# Altium PCB PCB_3U_Tester.PCBDOC
Units mil, origin at the board's own origin, x right, y up, seen from the top; angles counter-clockwise.
Board outline 2496.06 x 3937 mil, 4 copper layers (TopLayer, Internal Plane 2, Internal Plane 1, BottomLayer), stack 35.634 mil thick; 69 components, 58 nets, 346 pads, 138 vias.
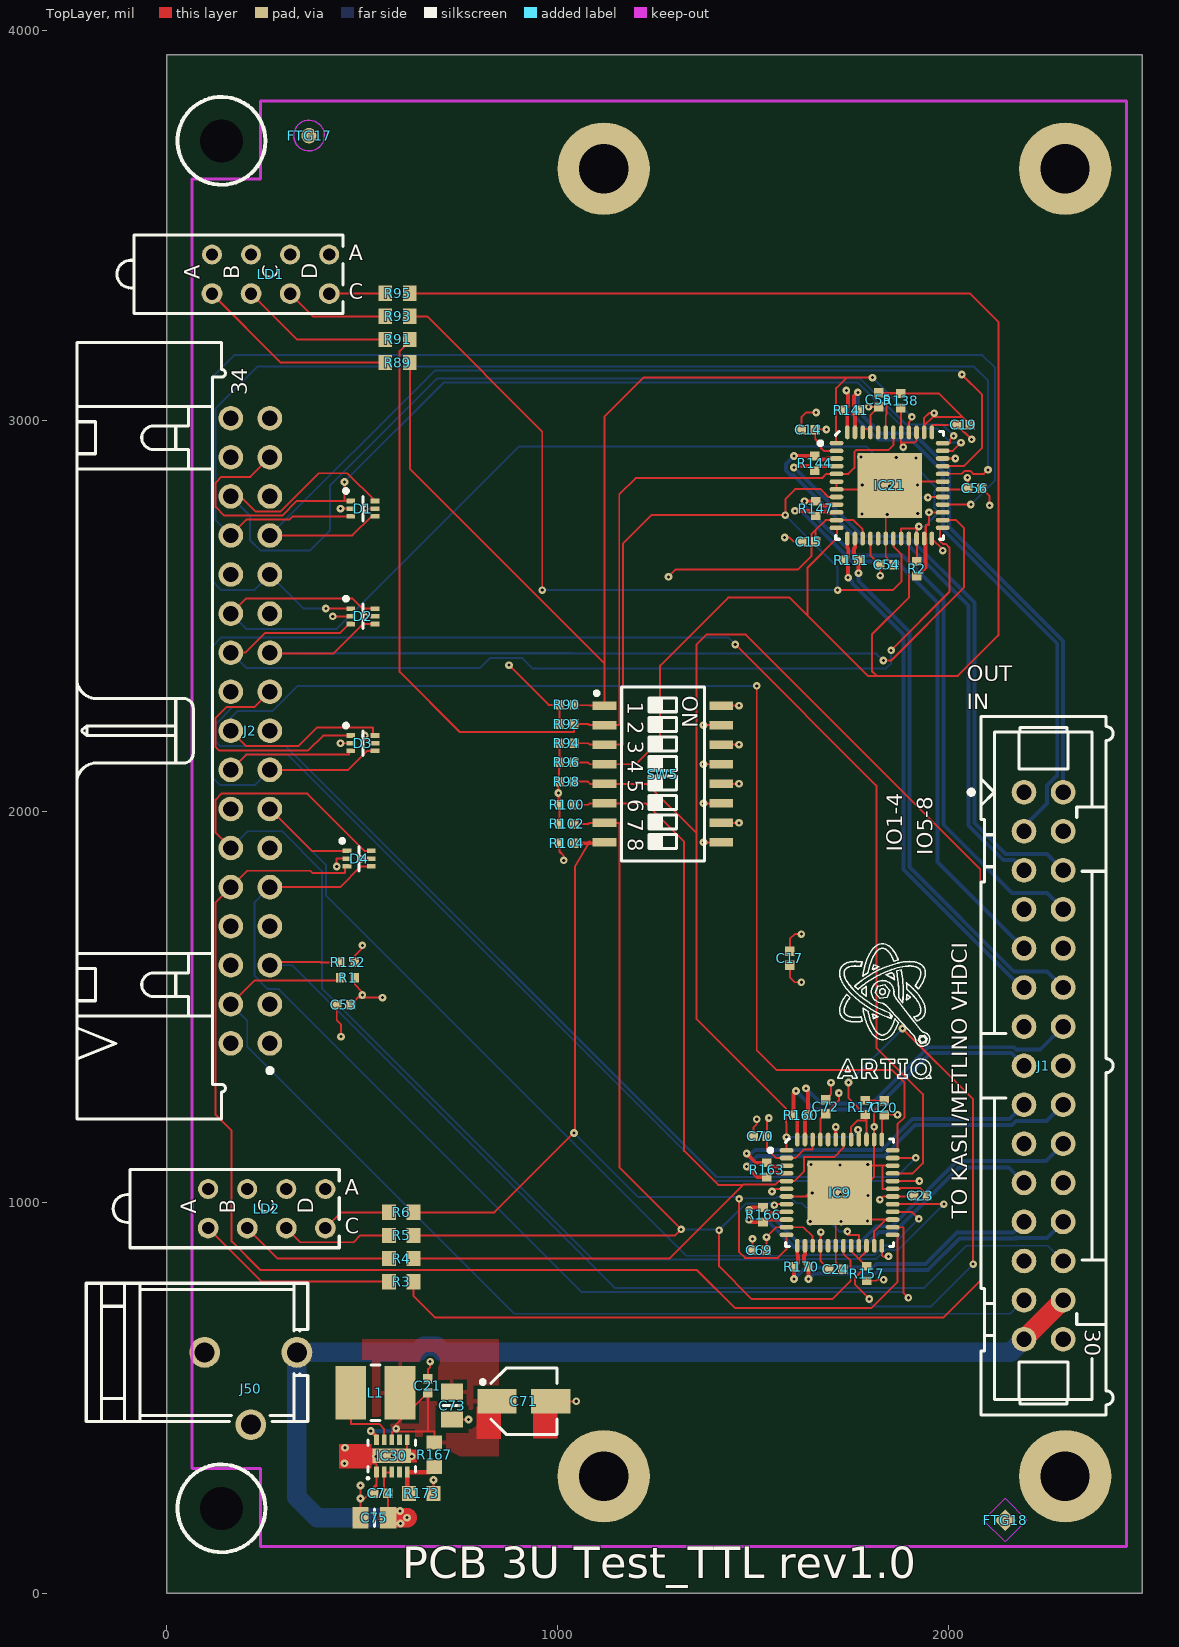
[diagram p0: TopLayer view]
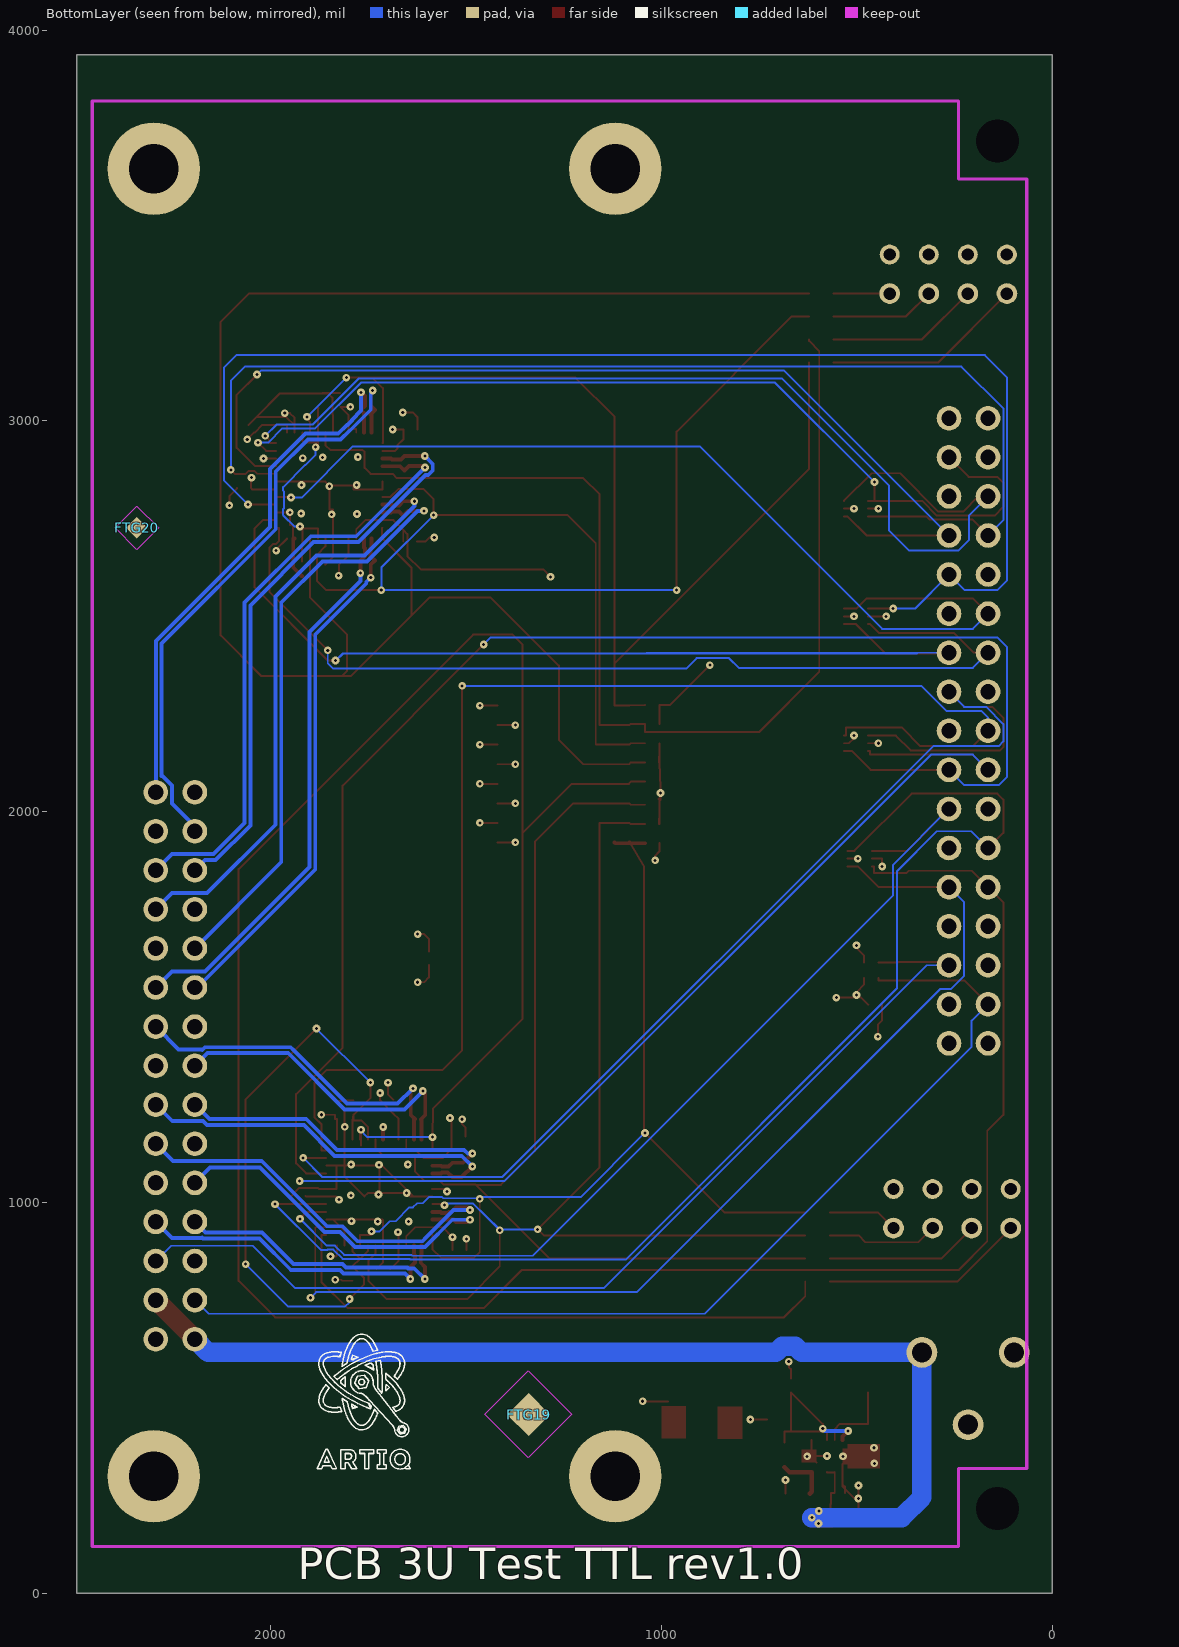
[diagram p1: BottomLayer view, seen from below]
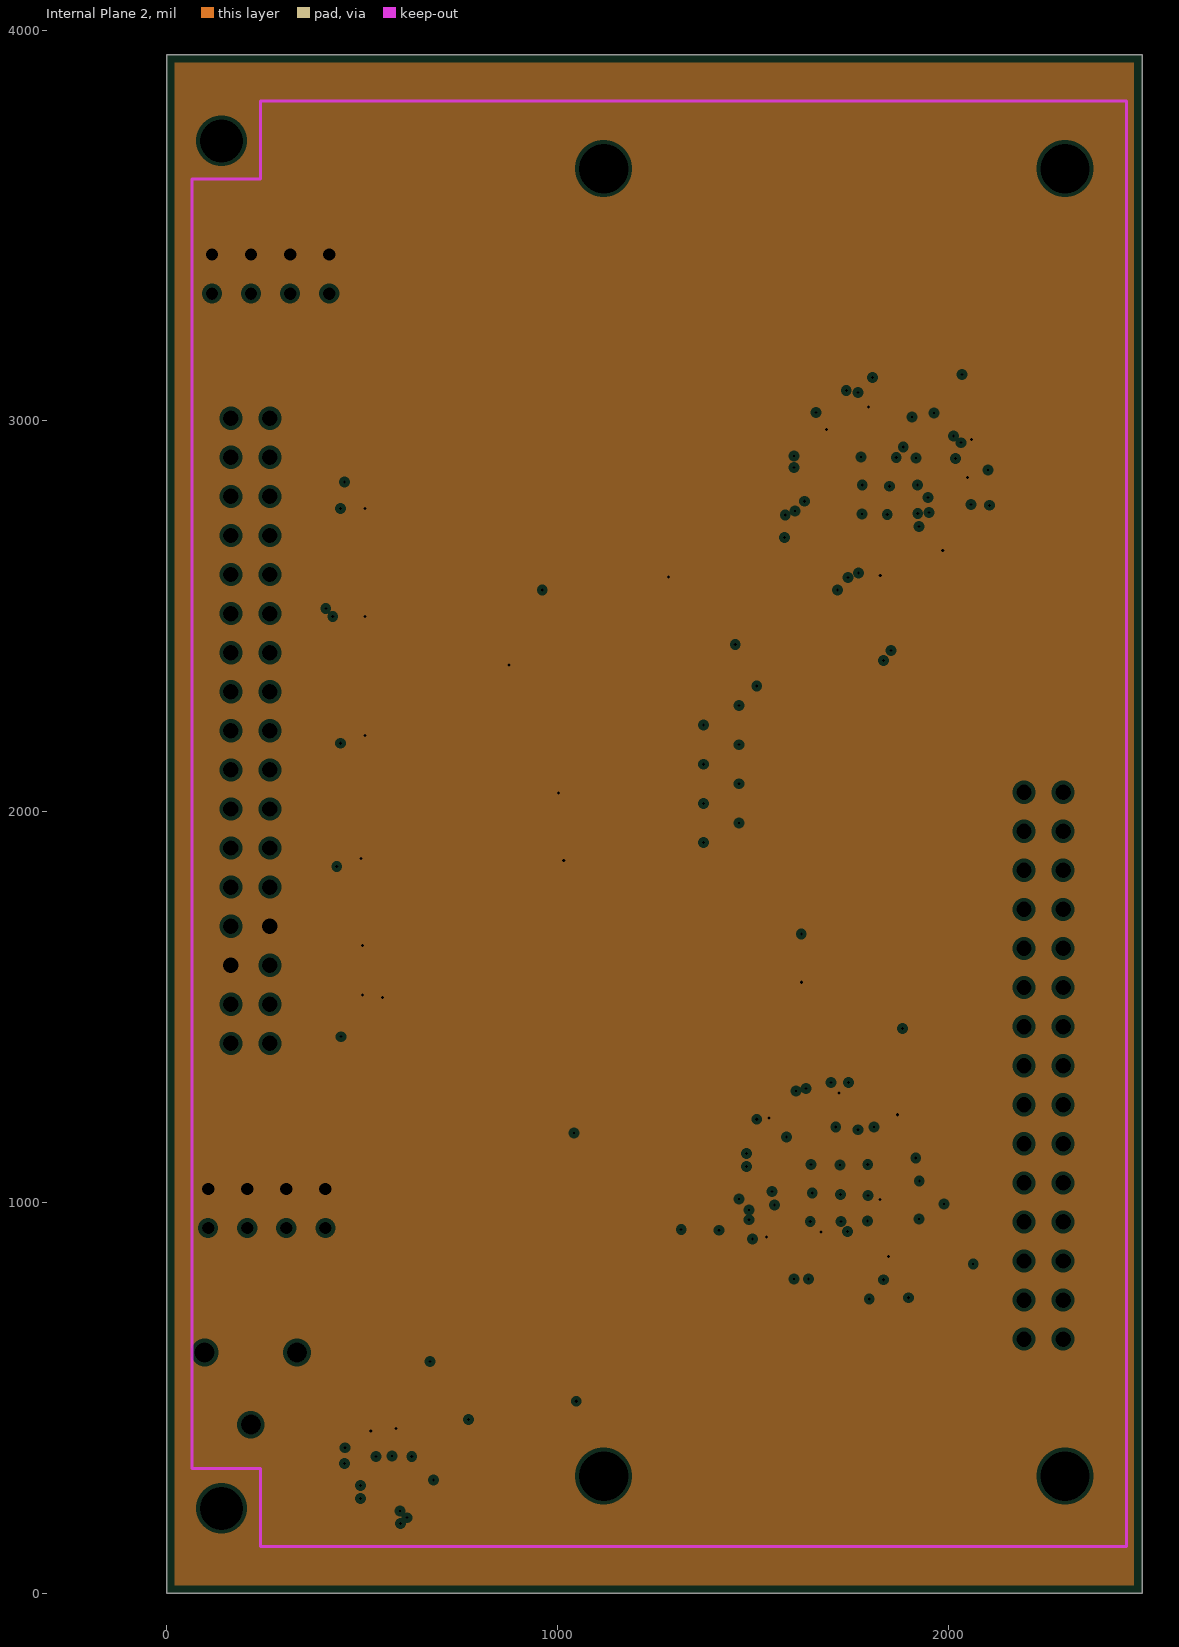
[diagram p2: Internal Plane 2, clearances drawn from the general rule]
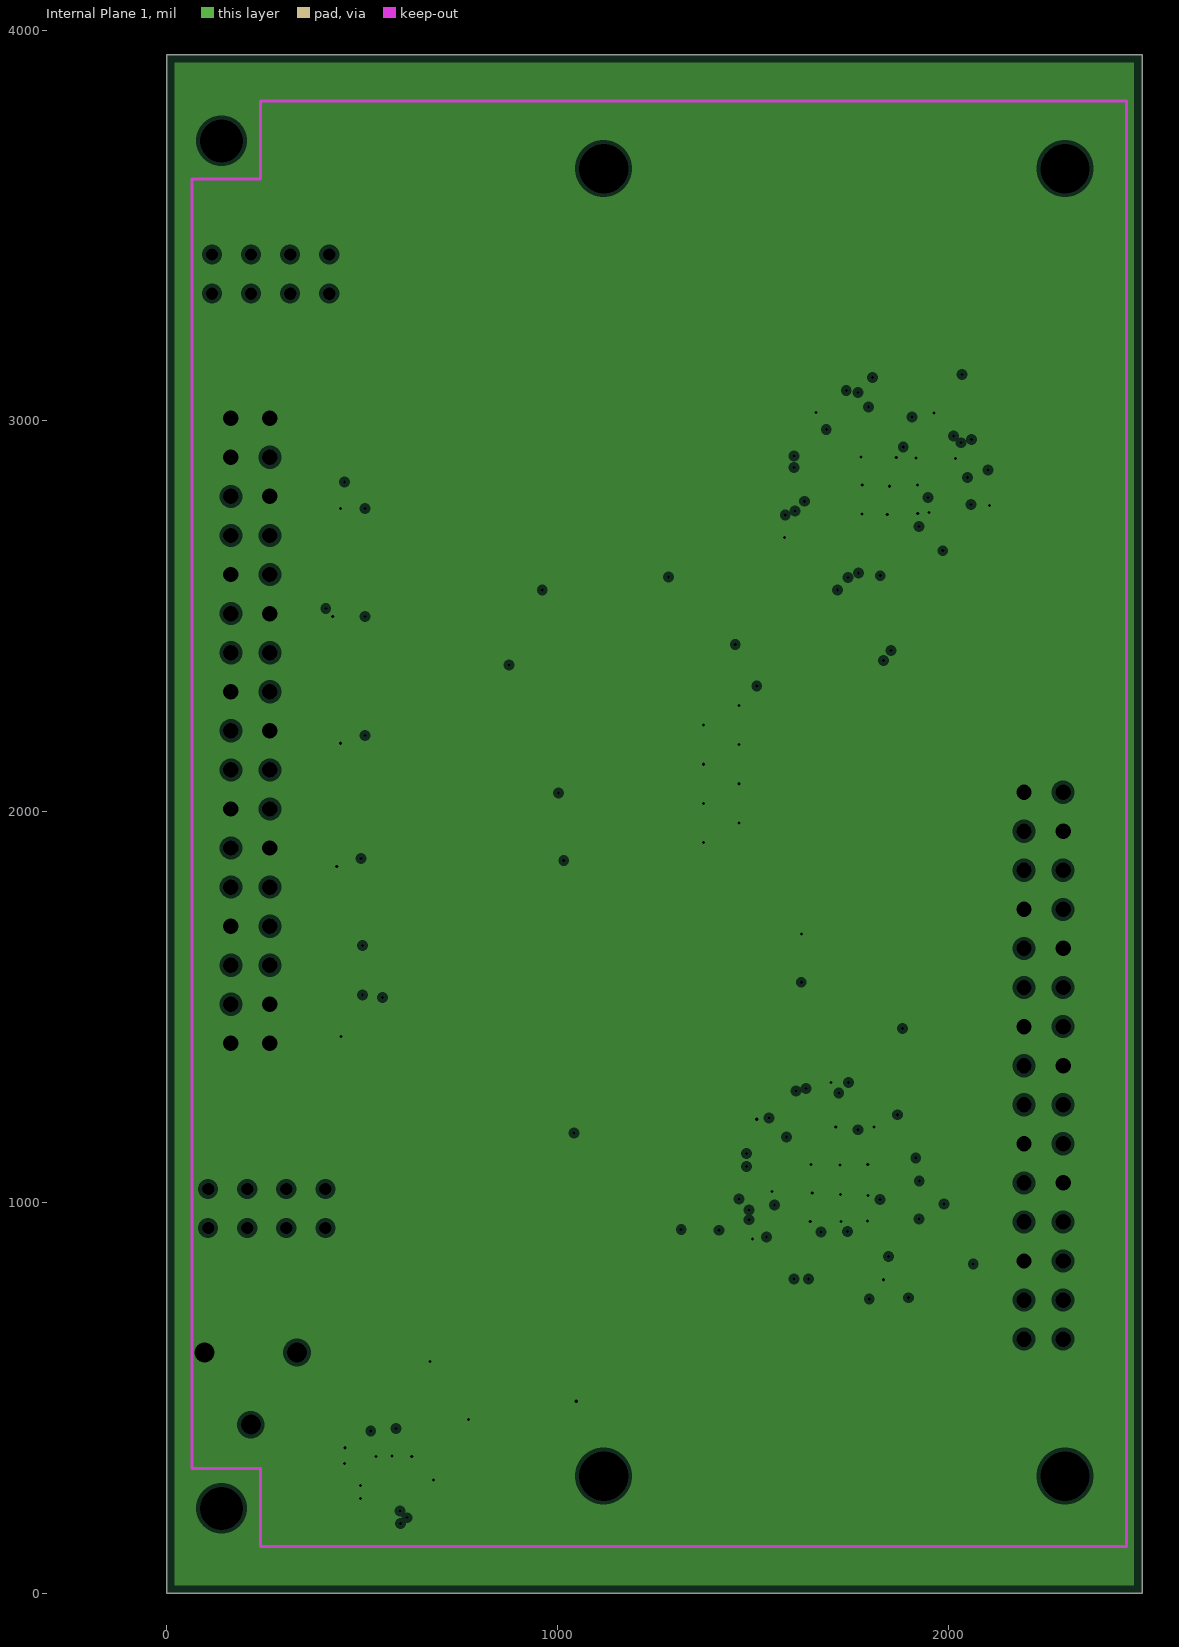
[diagram p3: Internal Plane 1, clearances drawn from the general rule]
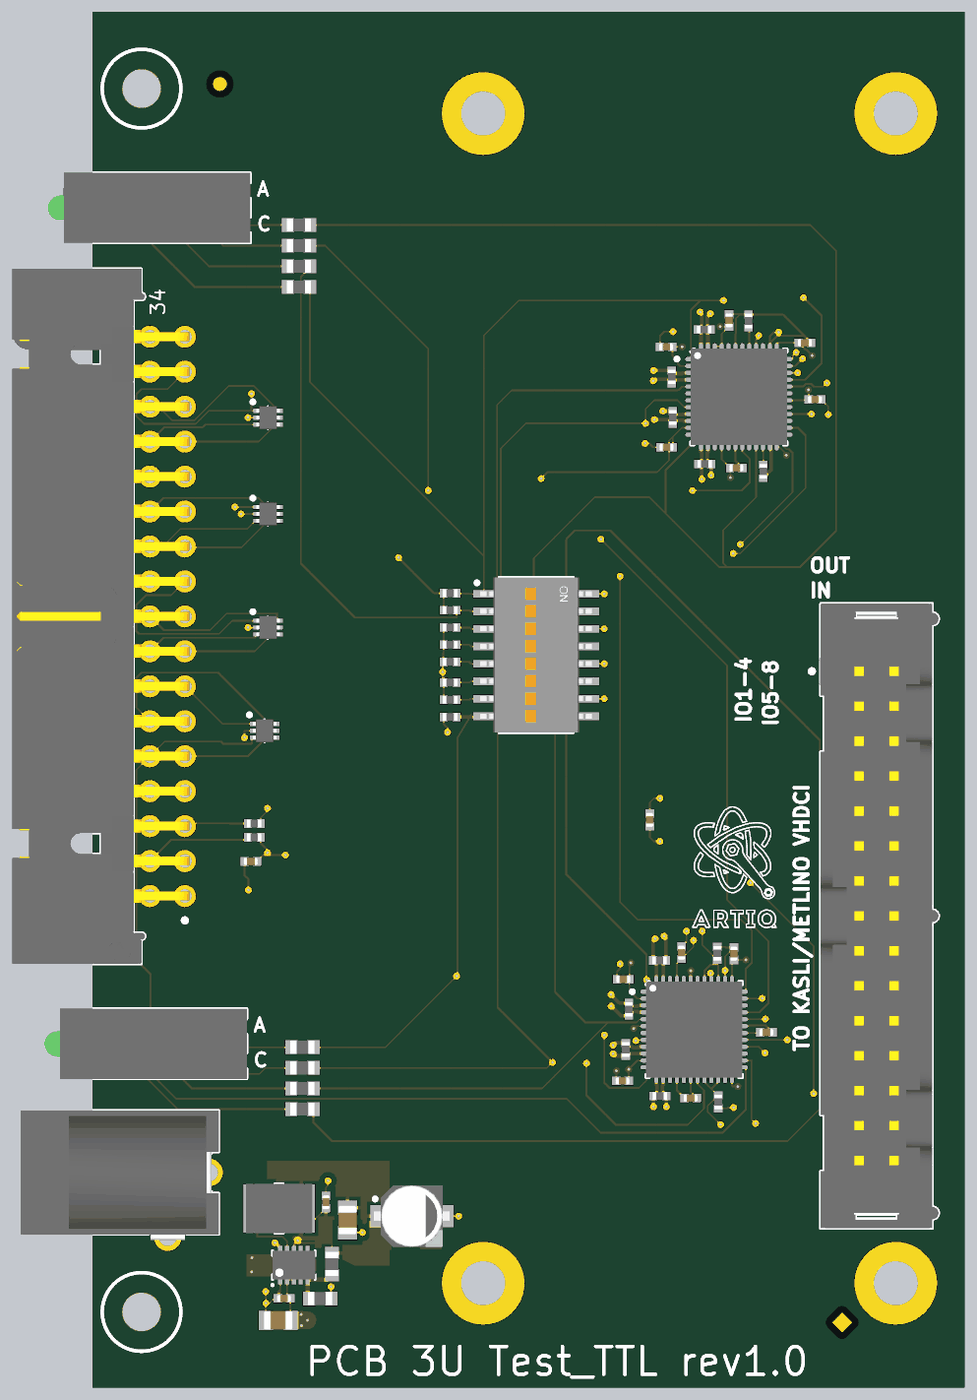
[diagram p4: 3D render of the assembled board from above, using the file's embedded part models]

## Layer stack, top to bottom
TopSolder: solder mask 0.4, Solder Resist, Dk 3.5
TopLayer: signal copper 1.4
Dielectric1: core 15, FR-4, Dk 4.8
Internal Plane 2: plane copper 1.417, net P3V3
Dielectric 3: prepreg 5, Dk 4.2
Internal Plane 1: plane copper 1.417, net GND
Dielectric2: core 10, FR-4, Dk 4.2
BottomLayer: signal copper 1.4
BottomSolder: solder mask 0.4, Solder Resist, Dk 3.5

## Board outline
0,0 2496.06,0 2496.06,3937 0,3937

## Design rules (kind name [scope] priority, off if disabled: settings)
Clearance Clearance_DIFF [(InDifferentialPairClass('All Differential Pairs'))] p1: gap=5 except(10: Arc-Poly Track-Poly SMDPad-Poly THPad-Poly Via-Poly Fill-Poly Poly-Poly Poly-Region Poly-Text)
Clearance [All] p2: gap=5 except(15: Arc-Poly Track-Poly SMDPad-Poly THPad-Poly Via-Poly Fill-Poly Poly-Poly)
DiffPairsRouting [All] p1: maxlimit=10 minlimit=5 mostfreqgap=5 toplayer_minwidth=5 toplayer_maxwidth=15 toplayer_prefwidth=10 bottomlayer_minwidth=5 bottomlayer_maxwidth=15 bottomlayer_prefwidth=10 maxuncoupledlength=500
FabricationTestPointUsage TestPointUsage [All] p1: valid=0 allowmultiple=FALSE
FabricationTestpoint Testpoint [All] p1: side=3 testpointundercomponent=TRUE minsize=40 maxsize=100 preferedsize=60 minholesize=20 maxholesize=40 preferedholesize=32 testpointgrid=1 allowsidetop=TRUE allowsidebottom=TRUE usegrid=TRUE gridtolerance=0.01
HoleSize [All] p1: absolutevalues=TRUE maxlimit=150 minlimit=1 maxpercent=80.000 minpercent=20.000
HoleToHoleClearance [All] p1: gap=1 allowstackedmicrovias=TRUE
MinimumSolderMaskSliver [All] p1: minsoldermaskwidth=0
PlaneClearance [All] p1: clearance=10
PlaneConnect [All] p1: planeconnectstyle=Direct reliefexpansion=20 reliefentries=4 reliefconductorwidth=10 reliefairgap=10
PolygonConnect PolygonConnect_pad [(InPadClass('All Pads'))] p1: connectstyle=Relief reliefconductorwidth=10 reliefentries=4 polygonreliefangle="90 Angle" airgapwidth=10
PolygonConnect [All] p2: connectstyle=Direct reliefconductorwidth=10 reliefentries=4 polygonreliefangle="45 Angle" airgapwidth=10
RoomDefinition PCB_3U_Tester [InComponentClass('PCB_3U_Tester')] p1: confinementstyle=ConfineIn formatcopy=TRUE lockcomponents=FALSE outline -960,-90 2512,-90 2512,4002 -960,4002
RoutingVias [All] p1: holewidth=7.87 width=19.68 viastyle="Through Hole" minholewidth=7.87 minwidth=19.68 maxholewidth=28 maxwidth=50
SilkToSilkClearance [All] p1: silktosilkclearance=0
SilkToSolderMaskClearance SilkscreenOverComponentPads [IsPad] p1: minsilkscreentomaskgap=0 clearancetoexposedcopper=TRUE
SolderMaskExpansion [All] p1: expansion=2
Width [All] p1: maxlimit=50 minlimit=5 preferedwidth=5
20 further rules are at their usual default settings.

## Classes and differential pairs
differential pair LVDS8: +LVDS8_P -LVDS8_N
differential pair LVDS7: +LVDS7_P -LVDS7_N
differential pair LVDS6: +LVDS6_P -LVDS6_N
differential pair LVDS5: +LVDS5_P -LVDS5_N
differential pair LVDS4: +LVDS4_P -LVDS4_N
differential pair LVDS3: +LVDS3_P -LVDS3_N
differential pair LVDS2: +LVDS2_P -LVDS2_N
differential pair LVDS1: +LVDS1_P -LVDS1_N

## Components (designator, comment, footprint, x,y, rotation, side; value= is the part's Value field where it differs from the comment)
C14 "100nF" CAPC1005X55N 1642,2978 r0 top
C15 "100nF" CAPC1005X55N 1643,2691 r0 top
C17 "100nF" CAPC1005X55N 1595,1625 r270 top
C19 "100nF" CAPC1005X55N 2039,2990 r180 top
C20 "100nF" CAPC1005X55N 1836,1242 r270 top
C21 "100nF" CAPC1005X55N 668,531 r270 top
C23 "100nF" CAPC1005X55N 1929,1017 r180 top
C24 "100nF" CAPC1005X55N 1712,829 r180 top
C53 "100nF" CAPC1005X55N 452.76,1505.91 r0 top
C54 "100nF" CAPC1005X55N 1843,2632 r180 top
C55 "100nF" CAPC1005X55N 1822,3054 r270 top
C56 "100nF" CAPC1005X55N 2068,2828 r180 top
C69 "100nF" CAPC1005X55N 1517,878 r0 top
C70 "100nF" CAPC1005X55N 1519,1169 r0 top
C71 "10uF" CAPAE430X540N 914,491 r0 top
C72 "100nF" CAPC1005X55N 1686,1245 r270 top
C73 "22uF" CAPC2012X135N 730,480 r90 top
C74 "100nF" CAPC1005X55N 548,256 r0 top
C75 "22uF" CAPC2012X135N 531.24,193 r0 top
D1 "NUP4114UPXV6T1G" SOTFL50P160X60-6N 501.97,2775.59 r0 top
D2 "NUP4114UPXV6T1G" SOTFL50P160X60-6N 501.97,2500 r0 top
D3 "NUP4114UPXV6T1G" SOTFL50P160X60-6N 501.97,2175.2 r0 top
D4 "NUP4114UPXV6T1G" SOTFL50P160X60-6N 492.13,1879.92 r0 top
FTG17 "Use only in PCB" FIDUCIAL_TOP_C100-200 364.17,3730.32 r90 top
FTG18 "Use only in PCB" FIDUCIAL_TOP_S100-200 2145.67,187.01 r90 top
FTG19 "Use only in PCB" FIDUCIAL_TOP_S200-400 1340,457 r180 bottom
FTG20 "Use only in PCB" FIDUCIAL_TOP_S100-200 2342.52,2726.38 r90 bottom
IC9 "SN65MLVD040RGZT" QFN50P700X700X100-49N-S420 1722,1025 r0 top
IC21 "SN65MLVD040RGZT" QFN50P700X700X100-49N-S420 1850,2835 r0 top
IC30 "TPS62175DQC" SON50P200X300X80-11N-R94X250 576,351 r90 top
J1 "Familly" 3M_N2530-6002RB 2244,1350 r270 top locked
J2 "Header 34" 3M_N2534-5002RB 214,2207 r90 top
J50 "Jack" CUI_PJ-102BH 97,616 r270 top
L1 "10uH" IND_MURATA-PS_8400 534.01,513 r0 top
LD1 "Green" LED_BIVAR_H485CGDL 265.75,3375.98 r0 top
LD2 "Green" LED_BIVAR_H485CGDL 255.91,984.25 r0 top
R1 "10k" RESC1005X40N 462.6,1574.8 r180 top
R2 "10k" RESC1005X40N 1920,2622 r270 top
R3 "220" RESC1608X55N 600.39,797.24 r0 top
R4 "220" RESC1608X55N 600.39,856.3 r0 top
R5 "220" RESC1608X55N 600.39,915.35 r0 top
R6 "220" RESC1608X55N 600.39,974.41 r0 top
R89 "220" RESC1608X55N 590.55,3149.61 r0 top
R90 "10k" RESC1005X40N 1023.62,2273.62 r180 top
R91 "220" RESC1608X55N 590.55,3208.66 r0 top
R92 "10k" RESC1005X40N 1023.62,2224.41 r180 top
R93 "220" RESC1608X55N 590.55,3267.72 r0 top
R94 "10k" RESC1005X40N 1023.62,2175.2 r180 top
R95 "220" RESC1608X55N 590.55,3326.77 r0 top
R96 "10k" RESC1005X40N 1023.62,2125.98 r180 top
R98 "10k" RESC1005X40N 1023.62,2076.77 r180 top
R100 "10k" RESC1005X40N 1023.62,2017.72 r180 top
R102 "10k" RESC1005X40N 1023.62,1968.5 r180 top
R104 "10k" RESC1005X40N 1023.62,1919.29 r180 top
R138 "100" RESC1005X40N 1878,3052 r90 top
R141 "100" RESC1005X40N 1751,3028 r180 top
R144 "100" RESC1005X40N 1658,2892 r270 top
R147 "100" RESC1005X40N 1661,2776 r270 top
R151 "100" RESC1005X40N 1752,2643 r0 top
R152 "10k" RESC1005X40N 462.6,1614.17 r180 top
R157 "100" RESC1005X40N 1791,818 r270 top
R160 "100" RESC1005X40N 1623,1223 r180 top
R163 "100" RESC1005X40N 1535,1083 r270 top
R166 "100" RESC1005X40N 1526,968 r270 top
R167 "270k" RESC1608X55N 685,354 r90 top
R170 "100" RESC1005X40N 1624,835 r0 top
R171 "10k" RESC1005X40N 1788,1243 r90 top
R173 "82k" RESC1608X55N 651,255 r180 top
SW5 "Switch" SW_TYCO_1-1571983-0 1269.69,2096.46 r0 top

## Footprints (in the part's own frame and the unit in brackets; to place one, negate y for a bottom-side part, rotate by r counter-clockwise, add the part's x,y. Pads: shape width x height; smd on the part's side, far side on the other; paste and mask are expansions set on the pad)
3M_N2530-6002RB [mm] "30 Contacts - Straight .100\" x .100\" Low Profile Four-Wall Header"
  round 1.6 hole 1: 1(-17.78,-1.27) 2(-17.78,1.27) 3(-15.24,-1.27) 4(-15.24,1.27) 5(-12.7,-1.27) 6(-12.7,1.27) 7(-10.16,-1.27) 8(-10.16,1.27) 9(-7.62,-1.27) 10(-7.62,1.27) 11(-5.08,-1.27) 12(-5.08,1.27) 13(-2.54,-1.27) 14(-2.54,1.27) 15(0,-1.27) 16(0,1.27) 17(2.54,-1.27) 18(2.54,1.27) 19(5.08,-1.27) 20(5.08,1.27) 21(7.62,-1.27) 22(7.62,1.27) 23(10.16,-1.27) 24(10.16,1.27) 25(12.7,-1.27) 26(12.7,1.27) 27(15.24,-1.27) 28(15.24,1.27) 29(17.78,-1.27) 30(17.78,1.27)
  silkscreen extent -22.71,-4.85 22.71,4.52, body extent -22.71,-4.11 22.71,4.52, height 9.91
3M_N2534-5002RB [mm] "34 Contacts - Right Angle .100\" x .100\" Low Profile Four-Wall Header"
  round 1.6 hole 1: 1(-20.32,-1.27) 2(-20.32,1.27) 3(-17.78,-1.27) 4(-17.78,1.27) 5(-15.24,-1.27) 6(-15.24,1.27) 7(-12.7,-1.27) 8(-12.7,1.27) 9(-10.16,-1.27) 10(-10.16,1.27) 11(-7.62,-1.27) 12(-7.62,1.27) 13(-5.08,-1.27) 14(-5.08,1.27) 15(-2.54,-1.27) 16(-2.54,1.27) 17(0,-1.27) 18(0,1.27) 19(2.54,-1.27) 20(2.54,1.27) 21(5.08,-1.27) 22(5.08,1.27) 23(7.62,-1.27) 24(7.62,1.27) 25(10.16,-1.27) 26(10.16,1.27) 27(12.7,-1.27) 28(12.7,1.27) 29(15.24,-1.27) 30(15.24,1.27) 31(17.78,-1.27) 32(17.78,1.27) 33(20.32,-1.27) 34(20.32,1.27)
  silkscreen extent -25.24,-1.42 25.25,11.28, body extent -25.24,-1.59 25.25,11.27, height 8.64
CAPAE430X540N [mm] "Capacitor, Aluminium Electrolytric, 4.3mm L X 4.3mm W X 5.4mm H, IPC Medium Density"
  rect 2.55x1.6 smd: 1(-1.75,0) 2(1.75,0)
  silkscreen extent -2.8,-2.15 2.15,2.15, body extent -2.75,-2.25 2.75,2.25, height 5.7
CAPC1005X55N [mm] "Chip Capacitor, Body 1.0x0.55mm, IPC Medium Density"
  rect 0.62x0.62 smd: 1(-0.45,0) 2(0.45,0)
  body extent -0.52,-0.27 0.53,0.28, height 0.55
CAPC2012X135N [mm] "Chip Capacitor, Body 2.0x1.25mm, IPC Medium Density"
  rect 1.05x1.4 smd: 1(-0.9,0) 2(0.9,0)
  silkscreen extent 0,-0.58 0,0.58, body extent -1.05,-0.67 1.05,0.68, height 1.25
CUI_PJ-102BH [mm] "2.5 mm Center Pin, 5A, 24V Right Angle, Through Hole, Tapered Pins, DC Power Jack Connector"
  round 2 hole 1.3: 1(0,6) 2(0,0) 3(4.7,3)
  silkscreen extent -4.5,-7.7 4.5,6.7, body extent -4.5,-7.7 4.9,6.7, height 11
FIDUCIAL_TOP_C100-200 [mm] "Round Fiducial Target, Top Layer, 1.0mm, Top Solder 2.0mm, Keepout =2.0mm"
  round 1 smd paste-0.51 mask+0.5: FTG2(0,0)
  TopLayer keep-out circle w0.1: c0,0 r1
FIDUCIAL_TOP_S100-200 [mm] "Square Fiducial Target, Top Layer, 1.0mm, Top Solder 2.0mm, Keepout =2.0mm"
  rect 1x1 smd rot 45 paste-0.51 mask+0.5: 1(0,0)
  TopLayer keep-out region: 1.414,0 0,-1.414 -1.414,0 0,1.414
FIDUCIAL_TOP_S200-400 [mm] "Square Fiducial Target, Top Layer, 2.0mm, Top Solder 4.0mm, Keepout =4.0mm"
  rect 2x2 smd rot 45 paste-0.9 mask+1: 1(0,0)
  TopLayer keep-out region: -2.839,0.011 -0.011,2.839 2.818,0.011 -0.011,-2.818
IND_MURATA-PS_8400 [mm] "Miniature Surface Mount Power Inductors, 4.5mm L X 3.3mm W X 2.9mm H, MURATA 8400 Serie"
  rect 2x3.5 smd: 1(-1.6,0) 2(1.6,0)
  silkscreen extent -0.3,-1.8 0.3,1.8, body extent -2.4,-1.8 2.4,1.8, height 2.9
LED_BIVAR_H485CGDL [mm] "Quad-Level 2mm Green, PCB Edge Mounting  BIVAR H485CGDL"
  round 1.35 hole 0.8: 1(-3.81,-1.27) 3(-1.27,-1.27) 5(1.27,-1.27) 7(3.81,-1.27)
  round 1.3 hole 0.8: 2(-3.81,1.27) 4(-1.27,1.27) 6(1.27,1.27) 8(3.81,1.27)
  silkscreen extent -9.99,-2.55 4.71,2.55, body extent -9.99,-2.55 4.71,2.55, height 11.3
QFN50P700X700X100-49N-S420 [mm] "QFN, 0.50mm Pitch, Square; 48 Pin, 7.00mm L X 7.00mm W X 1mm H body (W/Thermal Tab 4.2mm X 4.2mm), IPC Medium Density"
  oval 0.9x0.3 smd: 1(-3.45,2.75) 2(-3.45,2.25) 3(-3.45,1.75) 4(-3.45,1.25) 5(-3.45,0.75) 6(-3.45,0.25) 7(-3.45,-0.25) 8(-3.45,-0.75) 9(-3.45,-1.25) 10(-3.45,-1.75) 11(-3.45,-2.25) 12(-3.45,-2.75) 25(3.45,-2.75) 26(3.45,-2.25) 27(3.45,-1.75) 28(3.45,-1.25) 29(3.45,-0.75) 30(3.45,-0.25) 31(3.45,0.25) 32(3.45,0.75) 33(3.45,1.25) 34(3.45,1.75) 35(3.45,2.25) 36(3.45,2.75)
  oval 0.3x0.9 smd: 13(-2.75,-3.45) 14(-2.25,-3.45) 15(-1.75,-3.45) 16(-1.25,-3.45) 17(-0.75,-3.45) 18(-0.25,-3.45) 19(0.25,-3.45) 20(0.75,-3.45) 21(1.25,-3.45) 22(1.75,-3.45) 23(2.25,-3.45) 24(2.75,-3.45) 37(2.75,3.45) 38(2.25,3.45) 39(1.75,3.45) 40(1.25,3.45) 41(0.75,3.45) 42(0.25,3.45) 43(-0.25,3.45) 44(-0.75,3.45) 45(-1.25,3.45) 46(-1.75,3.45) 47(-2.25,3.45) 48(-2.75,3.45)
  rect 4.2x4.2 smd: 49(0,0)
  silkscreen extent -4.62,-3.5 3.5,3.5, body extent -3.5,-3.5 3.5,3.5, height 1
RESC1005X40N [mm] "Chip Resistor, EIA 0402, Metric 1005, Body 1.0x0.5mm, IPC Medium Density"
  rect 0.58x0.62 smd: 1(-0.47,0) 2(0.47,0)
  body extent -0.52,-0.27 0.53,0.28, height 0.4
RESC1608X55N [mm] "Chip Resistor, EIA 0603, Metric 1608, Body 1.6x0.8mm, IPC Medium Density"
  rect 0.9x1 smd: 1(-0.8,0) 2(0.8,0)
  body extent -0.87,-0.47 0.88,0.48, height 0.55
SON50P200X300X80-11N-R94X250 [mm] "SON, 10-Leads, Body 2x3mm, Pitch 0.5mm, Thermal Pad 0.94x2.5mm, IPC Medium Density"
  rect 0.7x0.3 smd: 1(-1.05,1) 2(-1.05,0.5) 3(-1.05,0) 4(-1.05,-0.5) 5(-1.05,-1) 6(1.05,-1) 7(1.05,-0.5) 8(1.05,0) 9(1.05,0.5) 10(1.05,1)
  rect 0.94x2.5 smd: 11(0,0)
  silkscreen extent -1.5,-1.55 1.05,1.6, body extent -1.05,-1.55 1.05,1.55, height 0.8
SOTFL50P160X60-6N [mm] "SOTFL (SOT666), 0.50mm, Pitch; 6 Pin, 1.20mm W X 1.60mm L X 0.60mm H Body, IPC Medium Density"
  rect 0.57x0.3 smd: 1(-0.79,0.5) 2(-0.79,0) 3(-0.79,-0.5) 4(0.79,-0.5) 5(0.79,0) 6(0.79,0.5)
  silkscreen extent -1.22,-0.8 0,1.27, body extent -0.85,-0.85 0.85,0.85, height 0.6
SW_TYCO_1-1571983-0 [mm] "Pitch 1.27mm,  Body 11.28x6.2mm, 8 Ways SPST Surface-Mount DIP Switch, TYCO GDH Serie"
  rect 1.55x0.55 smd: 1(-3.8,4.445) 2(-3.8,3.175) 3(-3.8,1.905) 4(-3.8,0.635) 5(-3.8,-0.635) 6(-3.8,-1.905) 7(-3.8,-3.175) 8(-3.8,-4.445) 9(3.8,-4.445) 10(3.8,-3.175) 11(3.8,-1.905) 12(3.8,-0.635) 13(3.8,0.635) 14(3.8,1.905) 15(3.8,3.175) 16(3.8,4.445)
  silkscreen extent -4.42,-5.65 2.7,5.65, body extent -4.06,-5.64 4.06,5.64, height 2.36

## Part data
C14 C15 C17 C19 C20 C21 C23 C24 C53 C54 C55 C56 C69 C70 C72 C74: library part CC0402_100NF_16V_10%_X5R, "Non-polarised capacitor"
C71: library part CAE430-540_10UF_16V_20%, "Polarised capacitor"
C73 C75: library part CC0805_22UF_16V_10%_X5R, "Non-polarised capacitor"
FTG17: library part FIDUCIAL_TARGET_C100-200, "Fiducial Target"
FTG18 FTG20: library part FIDUCIAL_TARGET_S100-200, "Fiducial Target"
FTG19: library part FIDUCIAL_TARGET_S200-400, "Fiducial Target"
IC9 IC21: "4-Channel Half-Duplex M-LVDS Line Transceiver"
IC30: "4.75-28VDC to 1-6VDC, 500mA Step-Down Converter With Sleep Mode"
J1: library part 3M_N2530-6002RB, "Connector 30 Male"
J2: library part 3M_N2534-5002RB, "Connector 34 Male"
J50: library part CUI_PJ-102BH, "2.5 mm Center Pin, 5A, 24V Right Angle, Through Hole, Tapered Pins, DC Power Jack Connector"
L1: library part IND_10UH_10%_MURATA-PS_8400, "Inductor With Core"
LD1 LD2: library part LED_BIVAR_H485CGDL, "LED x4 Green 1C2A-BOT_3C4A_5C6A_7C8A-TOP"
R1 R2 R90 R92 R94 R96 R98 R100 R102 R104 R152 R171: library part R0402_10K_1%_0.0625W_100PPM, "Resistor - 1%"
R3 R4 R5 R6 R89 R91 R93 R95: library part R0603_220R_1%_0.1W_100PPM, "Resistor - 1%"
R138 R141 R144 R147 R151 R157 R160 R163 R166 R170: library part R0402_100R_1%_0.1W_100PPM, "Resistor - 1%"
R167: library part R0603_270K_1%_0.1W_100PPM, "Resistor - 1%"
R173: library part R0603_82K_1%_0.1W_100PPM, "Resistor - 1%"
SW5: library part SW_TYCO_1-1571983-0, "8 Ways SPST DIP Switch"

## Free pads (board coordinates)
  round 236.22 hole 125.98: 0(2299.21,299.21) 1(2299.21,3645.67) 2(1118.11,3645.67) 3(1118.11,299.21)
  round 50 hole 110: 1(140,3717) 2(140,217)

## Via types
v1: diameter 19.68, hole 7.87, TopLayer to BottomLayer, 97 vias
v2: diameter 19.68, hole 7.87, TopLayer to BottomLayer, tented both sides, 41 vias

## Nets (pads, with @x,y where several pads share a name; then routed paths per layer and width w, separated by ;. In a path a pad name is that pad's centre, name@x,y a point inside that pad or via, vN(x,y) a via of type N, cw(c..) or ccw(c..) an arc to the next point about the centre after c; other vN are vias at no path point)
D1: D1.1 IC21.35 J2.31 | length 2449.5
  TopLayer w5: J2.31 214,2857 140,2857 125,2842 125,2780 147,2758 295.14,2758 332.42,2795.28 454.72,2795.28 ; v1(454.72,2843.88) 454.72,2795.28 ; D1.1 454.72,2795.28 ; IC21.35 2011.75,2923.58 v1(2032.58,2944.42)
  BottomLayer w5: v1(454.72,2843.88) 709.34,3098.5 1768.5,3098.5 1886,2981 1970.47,2981 2006.82,2944.66 2032.34,2944.66 v1(2032.58,2944.42)
D2: D1.3 IC21.32 J2.28 | length 3059.5
  TopLayer w5: J2.28 205,2748 314.24,2748 322.14,2755.91 D1.3 ; IC21.32 1986.3,2865 2034.47,2865 2041.82,2872.34 2056.18,2872.34 2064,2864.53 2091.53,2864.53 v1(2102,2875)
  BottomLayer w5: J2.28 125,2746 125,3032 232,3139 2066,3139 2102,3103 v1(2102,2875)
D3: D2.1 IC21.28 J2.25 | length 3428
  TopLayer w5: v1(407,2520) 407.31,2519.69 D2.1 ; IC21.28 2057.79,2785.79 v1(2058,2786)
  BottomLayer w5: v1(407,2520) 351,2520 J2.25 224,2567 140,2567 115,2592 115,3111 172.34,3168.34 2087.66,3168.34 2120,3136 2120,2848 v1(2058,2786)
D4: D2.3 IC21.25 J2.22 | length 2500.3
  TopLayer w5: J2.22 201,2407 251,2457 442.68,2457 466,2480.32 D2.3 ; v1(1854,2413) 2003.34,2562.34 2003.34,2675.18 1993.18,2685.34 1986.24,2685.34 1979,2692.58 1979,2726.73 IC21.25
  BottomLayer w5: J2.22 203,2368 802,2368 827,2393 910,2393 937,2366 1840,2366 1854,2380 v1(1854,2413)
D5: D3.1 IC9.35 J2.19 | length 3157.5
  TopLayer w5: J2.19 225,2268 153,2268 125,2240 125,2165 133,2157 362.12,2157 400,2194.88 D3.1 ; IC9.35 1916.58,1113.58 v1(1917,1114)
  BottomLayer w5: J2.19 225,2268 169,2268 125,2224 125,2180 137,2168 304,2168 1407,1065 1868,1065 v1(1917,1114)
D6: D3.3 IC9.32 J2.16 | length 2631
  TopLayer w5: J2.16 202.99,2146 466,2146 466,2155.51 D3.3 ; IC9.32 1925.53,1054.53 v1(1926,1055)
  BottomLayer w5: J2.16 203,2146 310,2146 1401,1055 v1(1926,1055)
D7: D4.1 IC9.28 J2.13 | length 2535.6
  TopLayer w5: J2.13 371.39,1899.61 D4.1 ; IC9.28 1907.21,975.79 v1(1925,958)
  BottomLayer w5: J2.13 407,1864 407,1786 1329.57,863.43 1638.1,863.43 1640.18,865.5 1811.83,865.5 1835.67,889.34 1856.34,889.34 v1(1925,958)
D8: D4.3 IC9.25 J2.10 | length 3209.4
  TopLayer w5: D4.3 456,1860.24 456,1842.58 373.72,1842.58 367.5,1848.8 205.8,1848.8 J2.10 125,1768 125,1224 166,1183 166,900 239,827 1357,827 1454,730 1804,730 1870,796 1870,916.73 IC9.25
DIR_CTRL1: IC21.1 IC21.40 R89.2 R90.1 SW5.1 | length 2886.4
  TopLayer w5: R89.2 622.05,2877.95 1120,2380 ; R90.1 1082.17,2271.46 SW5.1@1120,2271.46 ; SW5.1 SW5.1@1120,2271.46 ; IC21.1 1713,2943.27 1713,3084 1740,3111 ; v1(1806.47,3111) 1740,3111 ; IC21.40 1899.21,2997 1907,3004.79 v1(1907,3010.47) ; SW5.1@1120,2271.46 1120,2380 ; 1120,2380 1120,3011 1220,3111 1740,3111
  BottomLayer w5: v1(1806.47,3111) v1(1907,3010.47)
DIR_CTRL2: IC21.5 IC21.42 R91.2 R92.1 SW5.2 | length 2910.2
  TopLayer w5: R91.2 622.05,3205.05 596,3179 596,2358 750,2204 1042.13,2204 R92.1 1079,2224.41 1081.95,2221.46 SW5.2 1158.09,2221.46 1158.09,2812.09 1200,2854 1677,2854 1687.53,2864.53 IC21.5 1744.35,2864.53 1759.82,2880 1759.82,2900.65 1759.66,2900.82 1759.66,2920.62 1759.82,2920.78 1764.38,2925.34 1846.87,2925.34 1859.84,2938.32 IC21.42
DIR_CTRL3: IC21.8 IC21.19 R93.2 R94.1 SW5.3 | length 3440.8
  TopLayer w5: R93.2 666.28,3267.72 961,2973 v1(961,2567) ; R94.1 1079,2175.2 1082.74,2171.46 SW5.3 1168.09,2171.46 1168.09,2687.09 1240,2759 v1(1583,2759) 1583,2800 1608.4,2825.4 1673.6,2825.4 1693.53,2805.47 IC21.8 ; v1(1717,2567) 1858,2567 1881,2590 1881,2658 1859.84,2679.16 IC21.19
  BottomLayer w5: v1(961,2567) v1(1717,2567) 1717,2625 v1(1583,2759)
DIR_CTRL4: IC21.12 IC21.21 R95.2 R96.1 SW5.4 | length 4492.5
  TopLayer w5: R95.2 2055,3326.77 2128.34,3253.43 2128.34,2451.34 2024.81,2347.81 1817.19,2347.81 ; R96.1 1078,2125.98 1082.53,2121.46 SW5.4 1200,2121.46 1262.66,2184.11 1262.66,2373.69 1436.97,2548 1594,2548 1640,2502 ; IC21.12 1715,2726.73 1715,2700 1640,2625 1640,2502 ; IC21.21 1899.21,2548 1805,2453.79 1805,2360 1817.19,2347.81 ; 1640,2502 1794.19,2347.81 1817.19,2347.81
DIR_CTRL5: IC9.1 IC9.40 R3.2 R98.1 SW5.5 | length 5639.3
  TopLayer w5: R3.2 631.89,760 686.23,705.66 1988.66,705.66 2082,799 2082,1853 1482,2453 1381,2453 1356,2428 1356,1944.46 ; R98.1 1078,2076.77 1083.32,2071.46 SW5.5 1229,2071.46 1356,1944.46 ; IC9.1@1585,1133.27 IC9.1@1586,1133.27 ; v1(1586,1167) IC9.1@1586,1133.27 ; IC9.1 IC9.1@1586,1133.27 ; IC9.40@1769,1145 v1(1769,1186) ; IC9.40 v1@1771.21,1185.64 ; 1356,1944.46 1356,1469 1585,1240 1585.68,1167 IC9.1@1586,1133.27
  BottomLayer w5: v1(1586,1167) 1752.57,1167 v1@1771.21,1185.64
DIR_CTRL6: IC9.5 IC9.42 R4.2 R100.1 SW5.6 | length 2561.6
  TopLayer w5: R4.2 1286.3,856.3 1475,1045 ; R100.1 1079,2017.72 1082.74,2021.46 SW5.6 1225.54,2021.46 1324,1923 1324,1132 1411,1045 1475,1045 ; IC9.42 1731.84,1140 1707.84,1116 1631,1116 1631,1080 1605.53,1054.53 IC9.5 1566.53,1054.53 1557.58,1045.58 1475.58,1045.58 1475,1045
DIR_CTRL7: IC9.8 IC9.19 R5.2 R102.1 SW5.7 | length 2895.3
  TopLayer w5: R5.2 1301,915.35 v1(1316.65,931) 1159,1088.65 1159,1971.46 SW5.7 1081.95,1971.46 1079,1968.5 R102.1 ; v1(1413.78,928.65) 1413.78,836.27 1497.55,752.5 1703.5,752.5 1750,799 1750,851 1731.84,869.16 IC9.19 ; v1(1555,993) 1555,994.94 1555.53,995.47 IC9.8
  BottomLayer w5: v1(1316.65,931) 1413.78,931 1482.82,997.69 ; v1(1413.78,928.65) 1482.82,997.69 ; v1(1555,993) 1555,996 1553.31,997.69 1482.82,997.69
DIR_CTRL8: IC9.12 IC9.21 R6.2 R104.1 SW5.8 | length 2557.3
  TopLayer w5: R6.2 838.66,974.41 v1(1042.13,1177.87) ; v1@1044.25,1170.41 1044.25,1859.17 1080,1919.29 ; 1082.16,1921.46 SW5.8 ; v1(1465,1009) 1465,873 1480,858 1564,858 1586,880 1586,916.73 IC9.12 ; v1(1742,926) 1742,917 1771.21,917 IC9.21
  TopLayer w10: R104.1 1080,1919.29 ; 1082.16,1921.46 1080,1919.29 ; SW5.8 1117.91,1919.29 1080,1919.29
  BottomLayer w5: v1(1042.13,1177.87) 1206.34,1013.66 1469.66,1013.66 v1(1465,1009) ; v1@1472.66,1010.66 1558.18,1010.66 1561.18,1013.66 1594.97,1013.66 1610.82,997.82 1625.18,997.82 1636,987 1645,987 1680.18,951.82 1695.18,951.82 1721,926 v1(1742,926)
GND: C14.1 C15.1 C17.1 C19.1 C20.1 C21.1 C23.1 C24.1 C53.1 C54.1 C55.1 C56.1 C69.1 C70.1 C71.2 C72.1 C73.1 C74.1 C75.1 D1.2 D2.2 D3.2 D4.2 IC9.6 IC9.7 IC9.18 IC9.23 IC9.27 IC9.31 IC9.34 IC9.38 IC9.43 IC9.49 IC21.6 IC21.7 IC21.18 IC21.23 IC21.27 IC21.31 IC21.34 IC21.38 IC21.43 IC21.49 IC30.1 IC30.6 IC30.11 J1.1 J1.4 J1.7 J1.10 J1.13 J1.16 J1.19 J1.22 J1.25 J2.1 J2.2 J2.3 J2.8 J2.11 J2.14 J2.17 J2.20 J2.23 J2.26 J2.29 J2.32 J2.33 J2.34 J50.2 R2.2 R138.2 R157.2 R171.2 R173.1 SW5.9 SW5.10 SW5.11 SW5.12 SW5.13 SW5.14 SW5.15 SW5.16 | length 4392.7
  TopLayer w5: v1(424.8,2500) D2.2 ; v1(434.96,1859.92) 434.96,1879.92 D4.2 ; C53.1 435.04,1465.77 446,1454.81 v1(446,1424.1) ; v1(444.8,2175.2) D3.2 ; v1(444.8,2775.59) D1.2 ; C75.1 v1(495.8,275.4) ; v1(496,242) 505.63,242 C74.1@530.28,266.65 ; 496,332 534,332 536.63,329.37 IC30.1 536.63,282.63 536.63,279 ; C74.1 C74.1@530.28,266.65 ; v2(576,351) IC30.11@615.37,351 ; IC30.11@603,334 615.37,346.37 IC30.11@615.37,351 ; IC30.6 IC30.11@615.37,351 ; C21.1 668,572.33 674,578.33 v1(674,592.52) ; R173.1 v1(682.5,289.53) ; C73.1 v1(772.4,444.57) ; C71.2 v1(1047.94,491) ; v1(1373.94,1921.46) SW5.9 ; v1(1373.94,2021.46) SW5.11 ; v1(1373.94,2121.46) SW5.13 ; v1(1373.94,2221.46) SW5.15 ; SW5.10 v1(1464.65,1971.46) ; SW5.12 v1(1464.65,2071.46) ; SW5.14 v1(1464.65,2171.46) ; SW5.16 v1(1464.65,2271.46) ; C69.1 v2(1499.28,906.72) ; C70.1 1501.28,1191.26 1510,1199.98 v1(1510,1212.8) ; v2(1549,1028) 1555.84,1034.84 IC9.6 IC9.6@1587,1034.84 ; v1(1581.48,2702) 1593.17,2702 1604.17,2691 C15.1 ; IC9.7 1643.16,1015.16 v2(1652,1024) 1751.16,1024 1760,1015.16 1810.58,1065.74 1810.58,1093.9 ; C17.1 1595,1674.26 1607.26,1686.52 v1(1624,1686.52) ; C14.1 1624.28,3009.54 1636.55,3021.8 v1(1662,3021.8) ; 1635.26,1015.16 1714,1093.9 IC9.49@1722,1093.9 ; C72.1 1700,1276.72 v1(1700,1306.52) ; IC21.6 1714,2844.84 1714,2825.16 IC21.7 1788,2825.16 1788,2835 IC21.49 ; IC9.49 IC9.49@1722,1093.9 ; C24.1 1712.16,846.56 IC9.18 1712.16,954.16 1714.1,956.1 1840,956.1 ; R171.2 1811.5,1261.5 1813.28,1259.72 C20.1 1810.58,1234.3 v1(1810.58,1193.39) IC9.38 1810.58,1093.9 ; R157.2 1816.37,799.5 1818.87,802 v1(1834.8,802) ; IC9.23 1810.58,926.68 1840,956.1 ; C55.1 1868,3071.72 R138.2@1868,3070.5 ; IC21.43 1840.16,3015.16 1842,3017 1842,3060 1852.5,3070.5 R138.2@1868,3070.5 ; IC9.27 1840,956.1 ; IC9.34 1832,1093.9 ; C54.1 1840.16,2652.56 IC21.18 1840.16,2773 1850,2773 v2(1850,2833) IC21.49 ; IC21.23 IC21.23@1942.34,2702.93 ; IC21.38 1938.58,2988.58 ; C23.1 1926.72,1037 1879.16,1037 1877,1034.84 IC9.31 1832,1034.84 1832,1093.9 ; v1@1951,2767 v1(1951,2766.1) ; v1(1964,3020.14) 1950.85,3020.14 1938.58,3007.88 1938.58,2988.58 ; IC21.27 v1(1951,2766.1) ; IC21.31 1859.84,2844.84 IC21.49 ; IC21.34 v1(2018.39,2903.9) ; C19.1 2036.72,3010 ; C56.1 2106,2807.72 v1(2106,2784.2) ; C74.1@530.28,266.65 530.28,269.65 ; C74.1@530.28,266.65 536.63,273 536.63,276 ; 530.28,269.65 530.28,272.65 536.63,279 ; 530.28,269.65 536.63,276 ; 536.63,276 536.63,279 ; IC9.49@1722,1093.9 1810.58,1093.9 ; 1810.58,1093.9 1832,1093.9 ; R138.2@1868,3070.5 R138.2 1976.21,3070.5 2036.72,3010 ; 1938.58,2988.58 1960,3010 2036.72,3010 ; IC21.23@1942.34,2702.93 1943,2703.59 1943,2730.66 ; IC21.23@1942.34,2702.93 1942.34,2730 1943,2730.66 ; 1943,2730.66 1946.34,2734 ; 1943,2730.66 1943,2734 1946.34,2734 ; 1946.34,2734 1951,2738.66 ; 1946.34,2734 1951,2734 1951,2738.66 ; 1951,2738.66 v1(1951,2766.1)
  TopLayer w10: IC9.43 v2(1712.16,1193.16) ; R2.2 1920.76,2603.5 1942.2,2624.94 1942.2,2699.17 IC21.23
  other v2: 455,332 535,350 627,350 456,372 1647,951 1726,951 1793,952 1795,1018 1724,1020 1723,1096 1649,1097 1794,1097 1844,2761 1779,2762 1922,2763 1780,2836 1921,2836 1918,2905 1867,2907 1777,2908
I2C_SCL: J1.27 J2.4 R1.2 | length 2724
  TopLayer w5: J2.4 225,1568 444.09,1568 R1.2
  BottomLayer w5: J2.4 206,1465 206,1398 889,715 2159,715 J1.27
I2C_SDA: J1.26 J2.5 R152.2 | length 2622
  TopLayer w5: J2.5 264,1615 393.17,1615 394,1614.17 R152.2
  BottomLayer w5: J2.5 321,1607 1147.66,780.34 1937.34,780.34 2046,889 2255.01,889 J1.26
LVDS1_N: IC21.48 J1.3 R141.2 | length 1557.3
  TopLayer w10: v1(1739.16,3078) 1744,3073.16 1744,3039.5 R141.2 1744.07,3016.42 1741.73,3014.08 IC21.48
  BottomLayer w10: v1(1739.16,3078) 1744,3073.16 1744,3028.79 1797.68,2975.11 1820.94,2952.84 1904.94,2952.84 1987.16,2870.63 1987.16,2722.84 2279,2431 2279,2091.5 2276.82,2091.5 2252.51,2067.19 2252.51,2020.66 2194,1962.16 J1.3
LVDS1_P: IC21.47 J1.2 R141.1 | length 1406.5
  TopLayer w10: IC21.47 1761.42,3015.23 1759.07,3017.57 R141.1 1759,3038.5 1759,3063.47 v1(1768.68,3073.16)
  BottomLayer w10: v1(1768.68,3073.16) 1768.68,3026.31 1792.27,3002.73 1792.27,3001.73 1803.89,2990.11 1804.88,2990.11 1827.15,2967.85 1911.19,2967.85 2002.16,2876.88 2002.16,2729.06 2294,2437.21 J1.2
LVDS2_N: IC21.4 J1.6 R144.2 | length 1566.5
  TopLayer w10: v1(1605,2881.08) 1608.92,2885 1646.5,2885 R144.2 1668.72,2884.21 IC21.4
  BottomLayer w10: v1(1605,2881.08) 1781.08,2705 1897,2705 2067,2535 2067,1971 2146.5,1891.5 2252.51,1891.5 J1.6
LVDS2_P: IC21.3 J1.5 R144.1 | length 1522.2
  TopLayer w10: v1(1605.5,2910.5) R144.1 1666.95,2901.56 1689.11,2901.56 1691.46,2903.9 IC21.3
  BottomLayer w10: v1(1605.5,2910.5) 1585.16,2890.16 1585.59,2889.73 1585.16,2889.3 1585.16,2872.86 1596.78,2861.24 1603.63,2861.24 1774.86,2690 1890,2690 2052,2528 2052,1964.79 2140.79,1876 2168,1876 J1.5
LVDS3_N: IC21.10 J1.9 R147.2 | length 1556.1
  TopLayer w10: v1(1607.84,2770) 1648.5,2770 R147.2 1671.95,2768.44 1689.11,2768.44 1691.46,2766.1 IC21.10
  BottomLayer w10: v1(1607.84,2770) 1623.79,2770 1753.29,2640.5 1867.5,2640.5 1973,2535 1973,1871.01 J1.9
LVDS3_P: IC21.9 J1.8 R147.1 | length 1530.7
  TopLayer w10: v1(1632.21,2794.5) R147.1 1672.06,2783.44 1689.11,2783.44 1691.46,2785.79 IC21.9
  BottomLayer w10: v1(1632.21,2794.5) 1632.21,2782.79 1759.5,2655.5 1882.77,2655.5 1988,2550.27 1988,1966.61 2163.11,1791.5 2252.51,1791.5 J1.8
LVDS4_N: IC21.14 J1.12 R151.2 | length 1421.4
  TopLayer w10: IC21.14 1761.42,2676.46 1759.07,2674.11 1759.07,2654.43 R151.2 v1(1770.5,2610.66)
  BottomLayer w10: v1(1770.5,2610.66) 1770.5,2590.5 1901,2460 1901,1858.21 2167.72,1591.5 2252.51,1591.5 J1.12
LVDS4_P: IC21.13 J1.11 R151.1 | length 1348.8
  TopLayer w10: IC21.13 1741.73,2676.46 1744.07,2674.11 1744.07,2653.58 R151.1 1744,2632.5 v1(1744,2599.16)
  BottomLayer w10: v1(1744,2599.16) 1755.5,2587.65 1755.5,2584.28 1886,2453.79 1886,1852 2188,1550 J1.11
LVDS5_N: IC9.48 J1.15 R160.2 | length 808.9
  TopLayer w10: v1(1610.5,1285) 1604.5,1279 R160.2 1605.5,1223 1616.07,1212.42 1613.73,1210.08 IC9.48
  BottomLayer w10: v1(1610.5,1285) 1657.5,1238 1811,1238 1955,1382 2162.01,1382 J1.15
LVDS5_P: IC9.47 J1.14 R160.1 | length 900.9
  TopLayer w10: IC9.47 1633.42,1211.23 1631.07,1213.57 1640.5,1223 R160.1 1641.5,1286.5 v1(1636,1292)
  BottomLayer w10: v1(1636,1292) 1675,1253 1804.79,1253 1943.28,1391.5 1948.79,1397 2168.22,1397 2175.27,1389.95 2176.82,1391.5 2211.19,1391.5 2235.5,1391.5 J1.14
LVDS6_N: IC9.4 J1.18 R163.2 | length 995
  TopLayer w10: v1(1484,1092) 1511.5,1064.5 R163.2 1547.06,1076.56 1561.11,1076.56 1563.46,1074.21 IC9.4
  BottomLayer w10: v1(1484,1092) 1511,1119 1836.21,1119 1915.21,1198 2163.22,1198 2173.22,1208 2252,1208 J1.18
LVDS6_P: IC9.3 J1.17 R163.1 | length 878.8
  TopLayer w10: v1(1484,1125) 1507.5,1101.5 R163.1 1544.95,1091.56 1561.11,1091.56 1563.46,1093.9 IC9.3
  BottomLayer w10: v1(1484,1125) 1495.79,1125 1504.79,1134 1830,1134 1909,1213 2157,1213 J1.17
LVDS7_N: IC9.10 J1.21 R166.2 | length 935
  TopLayer w10: v1(1490,955.66) 1496.16,949.5 R166.2 1532.61,956.1 IC9.10
  BottomLayer w10: v1(1490,955.66) 1535.34,955.66 1605.5,885.5 1784.5,885.5 1822.89,923.89 1862.11,923.89 2027.21,1089 2155.01,1089 J1.21
LVDS7_P: IC9.9 J1.20 R166.1 | length 1045.8
  TopLayer w10: v1(1490,980.34) 1496.16,986.5 R166.1 1536.72,975.79 1544.15,975.79 1546.78,973.16 1563.22,973.16 1565.85,975.79 IC9.9
  BottomLayer w10: v1(1490,980.34) 1531.87,980.34 1601,911.21 1611.71,900.5 1778.29,900.5 1816.68,938.89 1855.89,938.89 2023,1106 2250,1106 J1.20
LVDS8_N: IC9.14 J1.24 R170.2 | length 804.1
  TopLayer w10: IC9.14 1633.42,866.46 1631.07,864.11 1631.07,846.43 R170.2 v1(1642.5,804)
  BottomLayer w10: v1(1642.5,804) 1656.5,818 1813.21,818 1822.37,827.16 1948.16,827.16 1950,829 2029,908 2173.22,908 2175.27,910.05 2176.82,908.51 2211.19,908.51 2252.51,908.51 J1.24
LVDS8_P: IC9.13 J1.23 R170.1 | length 739.5
  TopLayer w10: v1(1605.5,804) R170.1 1616.07,845.58 1616.07,864.11 1613.73,866.46 IC9.13
  BottomLayer w10: v1(1605.5,804) 1632.5,831 1648.29,831 1650.29,833 1807,833 1816.16,842.16 1941.94,842.16 2022.79,923 2167,923 J1.23
NetIC9_20: IC9.20 IC9.22 IC9.39 IC9.41 R157.1 R171.1 | length 1674
  TopLayer w5: v1(1745,1307) 1745,1267 1787.5,1224.5 R171.1 ; IC9.20 1751.53,875.47 1771.21,855.79 ; IC9.41 1751.53,1193.05 1768.47,1210 1788,1210 R171.1 ; IC9.22 1790.9,875.47 1771.21,855.79 ; IC9.39 1790.9,1210 R171.1 ; R157.1 R157.1@1790.75,836.25 ; v1(1798,753) 1761,790 1761,806.5 R157.1@1790.75,836.25 ; v1(1883,1445) 2064,1264 v1(2064,842) ; 1771.21,855.79 R157.1@1790.75,836.25
  BottomLayer w5: v1(1745,1307) v1(1883,1445) ; v1(1798,753) 1798,745 1810,733 1955,733 v1(2064,842)
NetIC21_20: IC21.20 IC21.22 IC21.39 IC21.41 R2.1 R138.1 | length 591.3
  TopLayer w5: R138.1 1879.53,3031.97 IC21.41 1879.53,2944.47 ; IC21.20 1879.53,2725 v1@1920,2725 ; v1(1885,2933) 1879.53,2938.47 1879.53,2944.47 ; IC21.39 1918.9,2950 1913.37,2944.47 1879.53,2944.47 ; R2.1 1920,2679 1918.9,2680.1 IC21.22 1918.9,2723.9 v1@1920,2725 ; v1(1925,2730) v1@1920,2725
  BottomLayer w5: v1(1885,2933) 1885,2913.47 1910.82,2887.66 1911.34,2887.66 1968.34,2830.66 1968.34,2822.02 1965.43,2819.1 1965.43,2777.1 1968.34,2774.18 1968.34,2758.92 1967.5,2758.08 ; v1(1925,2730) 1939.43,2730 1967.5,2758.07
NetIC30_5: IC30.5 R167.1 R173.2 | length 131.3
  TopLayer w12: R173.2 615.37,259.13 IC30.5 672.16,309.66 R167.1
NetIC30_9: IC30.9 L1.1 | length 198.3
  TopLayer w5: L1.1 471.02,433 543.31,433 556.31,420 IC30.9
NetLD1_1: LD1.1 R89.1 | length 516.4
  TopLayer w5: LD1.1 292.13,3149.61 R89.1
NetLD1_3: LD1.3 R91.1 | length 391.9
  TopLayer w5: LD1.3 333.07,3208.66 R91.1
NetLD1_5: LD1.5 R93.1 | length 267.4
  TopLayer w5: LD1.5 374.02,3267.72 R93.1
NetLD1_7: LD1.7 R95.1 | length 143.6
  TopLayer w5: LD1.7 487,3325.98 487.79,3326.77 R95.1
NetLD2_1: LD2.1 R3.1 | length 519.7
  TopLayer w5: LD2.1 242.91,797.24 R3.1
NetLD2_3: LD2.3 R4.1 | length 395.3
  TopLayer w5: LD2.3 283.86,856.3 R4.1
NetLD2_5: LD2.5 R5.1 | length 285.2
  TopLayer w5: LD2.5 342.16,898 478,898 495.35,915.35 R5.1
NetLD2_7: LD2.7 R6.1 | length 179.6
  TopLayer w5: LD2.7 446.06,974.41 R6.1
P3V3: C14.2 C15.2 C17.2 C19.2 C20.2 C21.2 C23.2 C24.2 C53.2 C54.2 C55.2 C56.2 C69.2 C70.2 C71.1 C72.2 C73.2 D1.5 D2.5 D3.5 D4.5 IC9.2 IC9.11 IC9.15 IC9.16 IC9.24 IC9.30 IC9.37 IC9.45 IC9.46 IC21.2 IC21.11 IC21.15 IC21.16 IC21.24 IC21.30 IC21.37 IC21.45 IC21.46 IC30.8 IC30.10 J2.6 J2.7 L1.2 LD1.2 LD1.4 LD1.6 LD1.8 LD2.2 LD2.4 LD2.6 LD2.8 R1.1 R90.2 R92.2 R94.2 R96.2 R98.2 R100.2 R102.2 R104.2 R152.1 R167.2 | length 3587.7
  TopLayer w5: C53.2 488.57,1524 v1(552.27,1524) ; R1.1 481.1,1557.93 500.6,1538.44 v1(500.6,1531) ; R152.1 481.1,1631.04 500.6,1650.54 v1(500.6,1657.98) ; v1(497.16,1879.92) D4.5 ; v1(507.01,2195.2) 507.01,2188.19 520,2175.2 D3.5 ; v1(507.01,2500) D2.5 ; v1(507.01,2775.59) D1.5 ; IC30.8 576,414 668,414 ; v1(587,421) 587,432.28 C21.2 668,414 ; R167.2 685,414 668,414 ; v1(876,2375) 977.38,2273.62 R90.2@1005,2273.62 ; 1002.12,2030.2 1002.12,2061.74 R96.2 ; v1(1002.12,2048) 1002.12,2037.82 1006.97,2032.97 1005.12,2031.12 R100.2 1005.12,1984 ; R104.2 1005.12,1898.12 1016,1887.23 v1(1016,1875.49) ; R94.2 1005.12,2142 ; R92.2 1005,2224.41 R90.2@1005,2273.62 ; R90.2 R90.2@1005,2273.62 ; v1(1284,2601) 1303,2620 1616,2620 1650,2654 1650,2710.42 1660.72,2721.13 ; C69.2 v2(1534.72,911.13) 1560,936.42 IC9.11 1629.58,936.42 1653.1,912.9 IC9.15 ; v2(1541,1216) 1536.72,1211.72 C70.2 1536.72,1136.87 1560,1113.58 IC9.2 1608.58,1113.58 1630,1135 1653.1,1135 IC9.46 ; C17.2 1595,1575.74 1607.26,1563.48 v1(1624,1563.48) ; C15.2 1660.72,2721.13 ; IC9.45 1672.79,1214.07 C72.2 1720,1261.28 v1(1720,1280) ; v2(1674,924) 1672.79,922.79 IC9.16 1672.79,850.5 C24.2 ; v2(1688,2978) C14.2 1659.72,2953.87 1675,2938.58 1675,2930 1681.42,2923.58 IC21.2 ; IC21.15@1781.1,2699 IC21.15 1781.1,2722.9 1757.58,2746.42 IC21.11 1686,2746.42 1660.72,2721.13 ; IC21.46 1781.1,2980 IC21.45@1800.79,2980 ; v2(1796.28,3036.28) C55.2 1800.79,3015.07 IC21.45@1800.79,2980 ; IC21.16 1800.79,2656.5 C54.2 1825.28,2604.72 v2(1826,2604) ; IC21.45 IC21.45@1800.79,2980 ; v2(1825,1007) 1833.16,1015.16 IC9.30 1909.44,1015.16 C23.2 ; IC9.24 1830.27,864.27 1832.54,862 v2(1847,862) ; IC9.37 1830.27,1214 1836,1214 C20.2 v2(1870.28,1224.28) ; IC21.24 1986,2671.44 v2(1986,2668) ; IC21.37 1958.27,2990 C19.2 2041.28,2970 2043,2970 v2(2060,2953) ; IC21.30 2047.44,2825.16 C56.2 2050.28,2853.72 v2(2049,2855) ; 1005.12,1984 R102.2 1006,1968.5 1006,1983.12 1005.12,1984 ; R96.2 1005.12,2142 ; R96.2 1006,2125.98 1006,2141.12 1005.12,2142
  TopLayer w10: v1(522,415) 536.63,400.37 IC30.10
  BottomLayer w10: v1(522,415) 581,415 v1(587,421)
P3V3_MP: J1.30
P12V0: C74.2 C75.2 IC30.2 IC30.3 J1.28 J1.29 J50.1 | length 2899.4
  TopLayer w5: IC30.2 IC30.2@556.31,309 ; C75.2 566.67,228 565.72,228.95 C74.2 556.31,256 IC30.2@556.31,309 ; IC30.3 576,309 IC30.2@556.31,309
  TopLayer w50: C75.2 v2(615,193) ; J1.29 J1.28
  BottomLayer w50: v2(615,193) 385,193 333.22,244.78 J50.1 641.14,616 657.5,632.36 690.5,632.36 706.86,616 2160,616 J1.29
  other v2: 598,178 597,210
R1: D1.6 IC21.36 J2.30 | length 2752.4
  TopLayer w5: J2.30 188.5,2807 227.5,2768 291,2768 389.28,2866.28 462,2866.28 533,2795.28 D1.6 ; IC21.36 2005,2943.27 2005,2953 v1(2014,2962)
  BottomLayer w5: J2.30 213,2758 213,2695 240,2668 366,2668 418,2720 418,2835 692,3109 1774,3109 1892,2991 1985,2991 v1(2014,2962)
R2: D1.4 IC21.33 J2.27 | length 2569.2
  TopLayer w5: J2.27 475.09,2707 524,2755.91 D1.4 ; IC21.33 2040,2884.21 2087,2931.21 2087,3067 v1(2035,3119)
  BottomLayer w5: J2.27 686,3129 2025,3129 v1(2035,3119)
R3: D2.6 IC21.29 J2.24 | length 2482.4
  TopLayer w5: J2.24 203,2546 474.69,2546 501,2519.69 D2.6 ; v1(1948,2804) 1949.47,2805.47 IC21.29
  BottomLayer w5: J2.24 203,2468 435,2468 902,2935 1790,2935 1921,2804 v1(1948,2804)
R4: D2.4 IC21.26 J2.21 | length 3873.8
  TopLayer w5: J2.21 266.27,2404.72 426.41,2404.72 502,2480.32 D2.4 ; v1(1834,2387) 1853.82,2387 2041,2574.18 2041,2725.42 2020,2746.42 IC21.26
  BottomLayer w5: J2.21 1814,2404.72 ; 345.27,2404.72 1814,2404.72 ; 1814,2404.72 1816.28,2404.72 v1(1834,2387) 1814,2404.72
R5: D3.6 IC9.36 J2.18 | length 3375.8
  TopLayer w5: J2.18 203,2168 337,2168 384,2215 528,2215 528,2194.88 D3.6 ; v1(1510,2322) 1510,1389 1560,1339 1856,1339 1887.63,1307.37 1887.63,1217.1 1870,1199.47 1870,1133.27 IC9.36
  BottomLayer w5: J2.18 164,2240 182,2258 271,2258 335,2322 v1(1510,2322)
R6: D3.4 IC9.33 J2.15 | length 3766.9
  TopLayer w5: J2.15 464.49,2107 513,2155.51 D3.4 ; v1(1455,2428) 1816,2067 1816,1396 1935,1277 1935,1100 1909.21,1074.21 IC9.33
  BottomLayer w5: J2.15 225,2068 137,2068 115,2090 115,2421 140,2446 1437,2446 v1(1455,2428)
R7: D4.6 IC9.29 J2.12 | length 3268.8
  TopLayer w5: J2.12 125,1946 125,2031 140,2046 359.61,2046 506,1899.61 D4.6 ; IC9.29 v1(1989,995.47)
  BottomLayer w5: J2.12 207,1950 295,1950 397,1848 397,1548 1091.57,853.43 1642.25,853.43 1644.32,855.5 1815.97,855.5 1839.82,879.34 1854.18,879.34 1855.18,878.34 1871.87,878.34 v1(1989,995.47)
R8: D4.4 IC9.26 J2.9 | length 2752.3
  TopLayer w5: J2.9 443.76,1807 497,1860.24 D4.4 ; IC9.26 1886,936.42 1886,768 v1(1898,756)
  BottomLayer w5: J2.9 225,1768 225,1580 259,1546 287,1546 1062.66,770.34 1883.66,770.34 v1(1898,756)
pads on no net: FTG17.FTG2 FTG18.1 FTG19.1 FTG20.1 IC9.17 IC9.44 IC21.17 IC21.44 IC30.4 IC30.7 J50.3

## Polygon pours and split planes (outlines as drawn)
P3V3 on TopLayer "Top Overlay-No Net" (solid, remove dead copper, pour order 30): 500,650 850,650 850,350 750,350 650,400 550,400 500,450
P3V3 on Internal Plane 2 (split plane): 2475.97,20.1 20.1,20.1 20.1,3916.9 2475.97,3916.9
GND on Internal Plane 1 (split plane): 2475.97,20.1 20.1,20.1 20.1,3916.9 2475.97,3916.9

## Keep-outs
KeepOutLayer:
  lines w8: 65,319 65,3619 240,3619 240,3819 2456.69,3819 2456.69,119 240,119 240,319 65,319

## Other copper
TopLayer:
  region net GND: 937,479 937,396 1000,396 1000,479
  region net P3V3: 793,478 793,395 856,395 856,478
  rectangle net GND: 496,332 536,370
  region net GND: 524,382 441,382 441,319 524,319
  rectangle net GND: 603,334 641,368

## Silkscreen, mask and mechanical layers (free items; w line width, h text height)
TopOverlay:
  drawing of 1218 lines, arcs and shapes, not listed
  text "OUT" at 2047,2334 h40
  text "IN" at 2047,2262 h40
  text "IO1-4" at 1883,1897 h40 r90
  text "IO5-8" at 1960,1888 h40 r90
  text "TO KASLI/METLINO VHDCI" at 2049,958 h40 r90
  text "PCB 3U Test_TTL rev1.0" at 603,38 h80
BottomOverlay:
  drawing of 1216 lines, arcs and shapes, not listed
  text "PCB 3U Test TTL rev1.0" at 1931,35 h80
Mechanical1:
  the board outline again, w20

## Dimensions
-20,217 to 0,0 on Mechanical4
140,-20 to 0,0 on Mechanical4

## Text inside footprints (layer, text, board x,y; h text height)
J1: TopOverlay "30" at 2349,675 h40 r270; Mechanical14 "30" at 2349,675 h40 r270
J2: TopOverlay "34" at 205.87,3065.48 h40 r90; Mechanical14 "34" at 205.87,3065.48 h40 r90
LD1: TopOverlay "C" at 465.75,3310.98 h39.37; TopOverlay "A" at 465.75,3410.98 h39.37; TopOverlay "A" at 85,3362.95 h39.37 r90; TopOverlay "B" at 185,3362.95 h39.37 r90; TopOverlay "C" at 285,3362.95 h39.37 r90; TopOverlay "D" at 385,3362.95 h39.37 r90; Mechanical14 "A" at 465.75,3410.98 h39.37; Mechanical14 "C" at 465.75,3310.98 h39.37; Mechanical14 "A" at 85,3362.95 h39.37 r90; Mechanical14 "B" at 185,3362.95 h39.37 r90; Mechanical14 "C" at 285,3362.95 h39.37 r90; Mechanical14 "D" at 385,3362.95 h39.37 r90
LD2: TopOverlay "C" at 455.91,919.25 h39.37; TopOverlay "A" at 455.91,1019.25 h39.37; TopOverlay "A" at 75.16,971.22 h39.37 r90; TopOverlay "B" at 175.16,971.22 h39.37 r90; TopOverlay "C" at 275.16,971.22 h39.37 r90; TopOverlay "D" at 375.16,971.22 h39.37 r90; Mechanical14 "A" at 455.91,1019.25 h39.37; Mechanical14 "C" at 455.91,919.25 h39.37; Mechanical14 "A" at 75.16,971.22 h39.37 r90; Mechanical14 "B" at 175.16,971.22 h39.37 r90; Mechanical14 "C" at 275.16,971.22 h39.37 r90; Mechanical14 "D" at 375.16,971.22 h39.37 r90
SW5: TopOverlay "1" at 1179.69,2281.46 h39.37 r270; TopOverlay "2" at 1179.69,2231.46 h39.37 r270; TopOverlay "ON" at 1319.69,2296.46 h39.37 r270; TopOverlay "3" at 1179.69,2181.46 h39.37 r270; TopOverlay "4" at 1179.69,2131.46 h39.37 r270; TopOverlay "5" at 1179.69,2081.46 h39.37 r270; TopOverlay "6" at 1179.69,2031.46 h39.37 r270; TopOverlay "7" at 1179.69,1981.46 h39.37 r270; TopOverlay "8" at 1179.69,1931.46 h39.37 r270; Mechanical14 "1" at 1180.08,2281.46 h39.37 r270; Mechanical14 "2" at 1180.08,2231.46 h39.37 r270; Mechanical14 "ON" at 1320.08,2296.46 h39.37 r270; Mechanical14 "3" at 1180.08,2181.46 h39.37 r270; Mechanical14 "4" at 1180.08,2131.46 h39.37 r270; Mechanical14 "5" at 1180.08,2081.46 h39.37 r270; Mechanical14 "6" at 1180.08,2031.46 h39.37 r270; Mechanical14 "7" at 1180.08,1981.46 h39.37 r270; Mechanical14 "8" at 1180.08,1931.46 h39.37 r270